# EAGLE board Low-profile_SD_(4-boards)(5x5cm) (EAGLE 6.4)
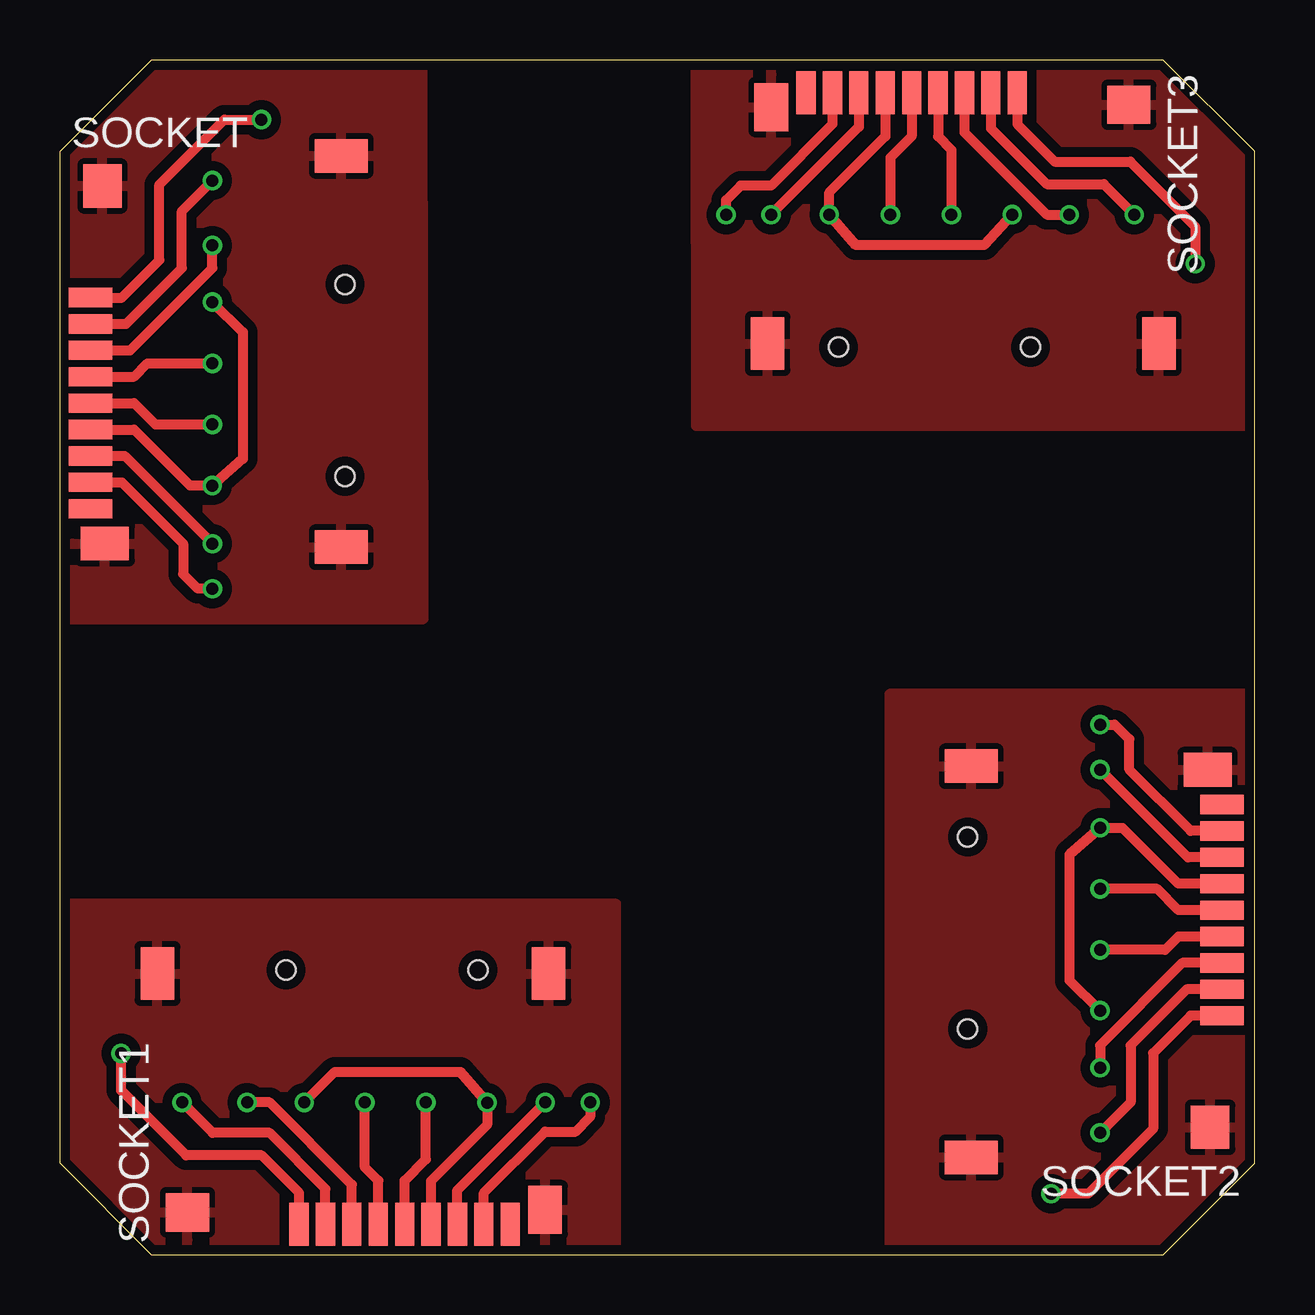
[diagram p0: board, top side]
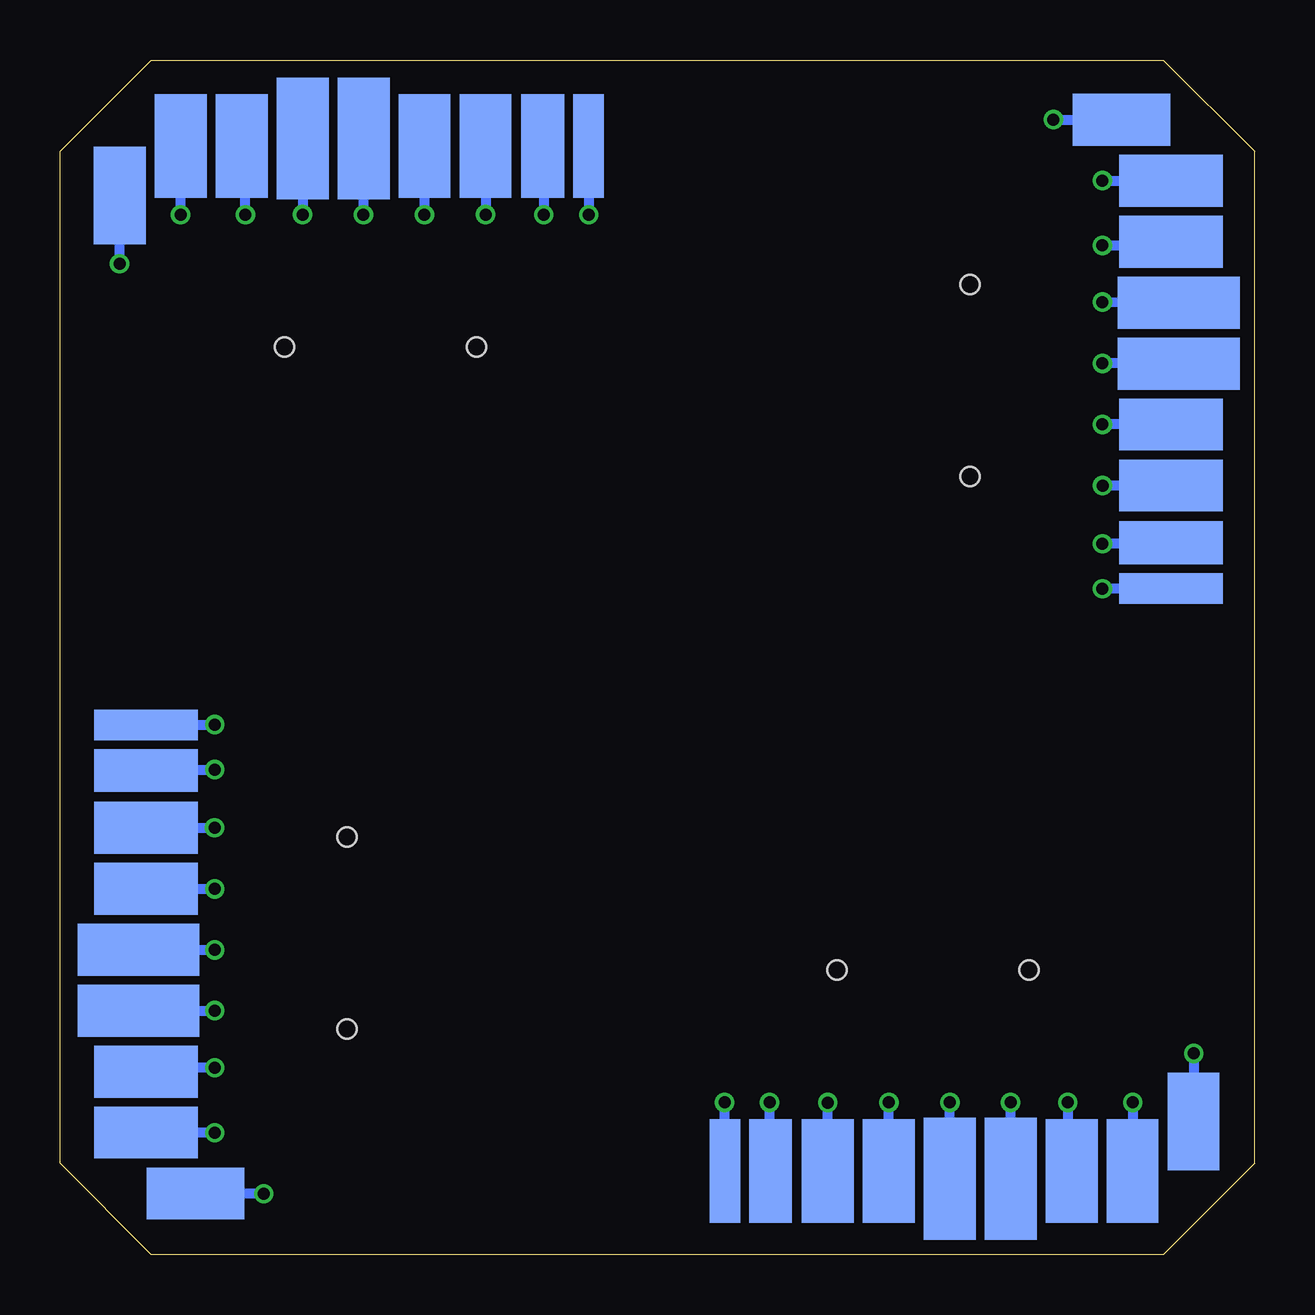
[diagram p1: board, bottom side, seen from below]

Size 49.78 x 49.78 mm. Coordinates in mm from the lower left corner, seen from the top.
Outline: 45.97,49.78 3.81,49.78 0,45.97 0,3.81 3.81,0 45.97,0 49.78,3.81 49.78,45.97 45.97,49.78
Copper layers (1*16): Top 0.035mm / dielectric 1.5mm / Bottom 0.035mm
Design rules "default": minimum track width 6mil, minimum drill 12mil, track to track 6mil, track to pad 6mil, pad to pad 6mil, via to via 6mil, smd to smd 0mil, copper to edge 10mil, drill to drill 10mil, minimum pad ring 10mil, minimum via ring 6mil, stop-mask expansion 2mil, vias tented up to drill 100mil, thermal gap 10mil

## Footprints (pad centres in the part's own frame; a part is rotated, then mirrored left to right if it is on the bottom)
SD_PADS = smd 4.318 x 2.159: CLK -4.128,13.811; CMD -4.128,6.191; DAT3 -4.128,3.651; VSS2 -4.128,16.351 | smd 4.318 x 1.778: DAT0 -4.128,18.733 | smd 4.318 x 1.27: DAT1 -4.128,20.637 | smd 4.064 x 2.159: DAT2 -2.064,1.111 | smd 5.08 x 2.159: VDD -4.445,11.271; VSS1 -4.445,8.731
MICROSD_PP = smd 1.8 x 0.8: 1 0,3.85; 2 0,2.75; 3 0,1.65; 4 0,0.55; 5 0,-0.55; 6 0,-1.65; 7 0,-2.75; 8 0,-3.85; 9 0,-4.95 | smd 1.6 x 1.8: GND@1 0.5,8.5 | smd 2.2 x 1.4: GND@2 10.45,9.75; GND@4 10.45,-6.55 | smd 2 x 1.4: GND@3 0.6,-6.4 | hole 0.8: 10.6,4.4; 10.6,-3.6

## Placement (x,y rotation side)
SD-PCB  SD_CARD_PADS  [SD_PADS]  7.62,48.41 180 bottom
SD-PCB1  SD_CARD_PADS  [SD_PADS]  1.44,7.62 90 bottom
SD-PCB2  SD_CARD_PADS  [SD_PADS]  42.07,1.44 0 bottom
SD-PCB3  SD_CARD_PADS  [SD_PADS]  48.41,42.07 270 bottom
SOCKET  MICROSD  [MICROSD_PP]  1.27,36.04 0 top
SOCKET1  MICROSD  [MICROSD_PP]  13.81,1.27 90 top
SOCKET2  MICROSD  [MICROSD_PP]  48.42,13.81 180 top
SOCKET3  MICROSD  [MICROSD_PP]  36.04,48.42 270 top

## Library data of the parts
SD-PCB SD-PCB1-SD-PCB3 SOCKET SOCKET1-SOCKET3 = ardublog-jra

## Nets
GND: SOCKET.GND@1 SOCKET.GND@2 SOCKET.GND@3 SOCKET.GND@4
GND1: SOCKET1.GND@1 SOCKET1.GND@2 SOCKET1.GND@3 SOCKET1.GND@4
GND2: SOCKET2.GND@1 SOCKET2.GND@2 SOCKET2.GND@3 SOCKET2.GND@4
GND3: SOCKET3.GND@1 SOCKET3.GND@2 SOCKET3.GND@3 SOCKET3.GND@4
N$1: SD-PCB.DAT3 SOCKET.2
N$2: SD-PCB.CMD SOCKET.3
N$3: SD-PCB.VDD SOCKET.4
N$4: SD-PCB.CLK SOCKET.5
N$5: SD-PCB.VSS1 SD-PCB.VSS2 SOCKET.6
N$6: SD-PCB.DAT0 SOCKET.7
N$7: SD-PCB.DAT1 SOCKET.8
N$8: SD-PCB.DAT2 SOCKET.1
N$9: SD-PCB1.DAT3 SOCKET1.2
N$10: SD-PCB1.CMD SOCKET1.3
N$11: SD-PCB1.VDD SOCKET1.4
N$12: SD-PCB1.CLK SOCKET1.5
N$13: SD-PCB1.VSS1 SD-PCB1.VSS2 SOCKET1.6
N$14: SD-PCB1.DAT0 SOCKET1.7
N$15: SD-PCB1.DAT1 SOCKET1.8
N$16: SD-PCB1.DAT2 SOCKET1.1
N$17: SD-PCB2.DAT3 SOCKET2.2
N$18: SD-PCB2.CMD SOCKET2.3
N$19: SD-PCB2.VDD SOCKET2.4
N$20: SD-PCB2.CLK SOCKET2.5
N$21: SD-PCB2.VSS1 SD-PCB2.VSS2 SOCKET2.6
N$22: SD-PCB2.DAT0 SOCKET2.7
N$23: SD-PCB2.DAT1 SOCKET2.8
N$24: SD-PCB2.DAT2 SOCKET2.1
N$25: SD-PCB3.DAT3 SOCKET3.2
N$26: SD-PCB3.CMD SOCKET3.3
N$27: SD-PCB3.VDD SOCKET3.4
N$28: SD-PCB3.CLK SOCKET3.5
N$29: SD-PCB3.VSS1 SD-PCB3.VSS2 SOCKET3.6
N$30: SD-PCB3.DAT0 SOCKET3.7
N$31: SD-PCB3.DAT1 SOCKET3.8
N$32: SD-PCB3.DAT2 SOCKET3.1

## Tracks (layer width: path | path; a pad name or v marks a point on that pad's centre or on a via)
GND
  pour Top (isolate 0.406): 0.04,26.47 15.16,26.49 15.12,49.74 3.81,49.72 0,45.91
GND1
  pour Top (isolate 0.406): 23.18,0 23.18,14.62 0.12,14.62 0.12,3.81 3.93,0
GND2
  pour Top (isolate 0.406): 49.69,23.39 34.56,23.37 34.56,0.1 45.88,0.12 49.69,3.93
GND3
  pour Top (isolate 0.406): 26.47,49.68 26.5,34.54 49.75,34.55 49.72,45.88 45.91,49.69
N$1  (via drill 0.5)
  Top 0.406: SOCKET.2 2.75,38.79 5.08,41.12 5.08,43.49 v6.35,44.76
  Bottom 0.406: SD-PCB.DAT3 3.65,44.93 3.64,44.92 3.8,44.76 v6.35,44.76
N$2  (via drill 0.5)
  Top 0.406: SOCKET.3 2.92,37.69 6.35,41.12 v6.35,42.05
  Bottom 0.406: SD-PCB.CMD 3.65,42.39 3.65,42.28 3.64,42.27 3.86,42.05 v6.35,42.05
N$3  (via drill 0.5)
  Top 0.406: SOCKET.4 3.09,36.59 3.64,37.14 v6.35,37.14
  Bottom 0.406: SD-PCB.VDD 3.33,37.31 3.5,37.14 v6.35,37.14
N$4  (via drill 0.5)
  Top 0.406: SOCKET.5 3.09,35.49 3.98,34.6 v6.35,34.6
  Bottom 0.406: SD-PCB.CLK 3.65,34.77 3.82,34.6 v6.35,34.6
N$5  (via drill 0.5)
  Top 0.406: v6.35,39.7 7.62,38.45 7.62,33.16 v6.34,32.05 5.42,32.05 3.09,34.39 SOCKET.6
  Bottom 0.406: SD-PCB.VSS1 v6.35,39.7 | SD-PCB.VSS2 v6.34,32.05
N$6  (via drill 0.5)
  Top 0.406: v6.35,29.63 6.3,29.68 6.29,29.68 2.69,33.29 SOCKET.7
  Bottom 0.406: SD-PCB.DAT0 3.53,29.63 v6.35,29.63
N$7  (via drill 0.5)
  Top 0.406: SOCKET.8 2.58,32.19 5.13,29.63 5.13,28.36 5.74,27.75 v6.35,27.75
  Bottom 0.406: SD-PCB.DAT1 3.51,27.75 v6.35,27.75
N$8  (via drill 0.5)
  Top 0.406: SOCKET.1 2.58,39.89 4.14,41.45 4.14,44.59 6.85,47.3 v8.39,47.3
  Bottom 0.406: 5.4,47.47 SD-PCB.DAT2 v8.39,47.29 v8.39,47.3
N$9  (via drill 0.5)
  Top 0.406: SOCKET1.2 11.06,2.75 8.73,5.08 6.36,5.08 v5.09,6.35
  Bottom 0.406: SD-PCB1.DAT3 4.92,3.65 4.93,3.64 5.09,3.8 v5.09,6.35
N$10  (via drill 0.5)
  Top 0.406: SOCKET1.3 12.16,2.92 8.73,6.35 v7.79,6.35
  Bottom 0.406: SD-PCB1.CMD 7.46,3.65 7.57,3.65 7.58,3.64 7.79,3.86 v7.79,6.35
N$11  (via drill 0.5)
  Top 0.406: SOCKET1.4 13.26,3.09 12.71,3.64 v12.71,6.35
  Bottom 0.406: SD-PCB1.VDD 12.54,3.33 12.71,3.5 v12.71,6.35
N$12  (via drill 0.5)
  Top 0.406: SOCKET1.5 14.36,3.09 15.25,3.98 v15.25,6.35
  Bottom 0.406: SD-PCB1.CLK 15.08,3.65 15.25,3.82 v15.25,6.35
N$13  (via drill 0.5)
  Top 0.406: v10.17,6.35 11.45,7.62 16.68,7.62 v17.79,6.34 17.79,5.42 15.46,3.09 SOCKET1.6
  Bottom 0.406: SD-PCB1.VSS1 v10.17,6.35 | SD-PCB1.VSS2 v17.79,6.34
N$14  (via drill 0.5)
  Top 0.406: v20.22,6.35 20.16,6.3 20.16,6.29 16.56,2.69 SOCKET1.7
  Bottom 0.406: SD-PCB1.DAT0 20.22,3.53 v20.22,6.35
N$15  (via drill 0.5)
  Top 0.406: SOCKET1.8 17.66,2.58 20.22,5.13 21.49,5.13 22.09,5.74 v22.09,6.35
  Bottom 0.406: SD-PCB1.DAT1 22.09,3.51 v22.09,6.35
N$16  (via drill 0.5)
  Top 0.406: SOCKET1.1 9.96,2.58 8.4,4.14 5.25,4.14 2.55,6.85 v2.55,8.39
  Bottom 0.406: 2.38,5.4 SD-PCB1.DAT2 v2.55,8.39
N$17  (via drill 0.5)
  Top 0.406: SOCKET2.2 46.94,11.06 44.61,8.73 44.61,6.36 v43.34,5.09
  Bottom 0.406: SD-PCB2.DAT3 46.04,4.92 46.05,4.93 45.88,5.09 v43.34,5.09
N$18  (via drill 0.5)
  Top 0.406: SOCKET2.3 46.77,12.16 43.34,8.73 v43.34,7.79
  Bottom 0.406: SD-PCB2.CMD 46.04,7.46 46.04,7.57 46.05,7.58 45.83,7.79 v43.34,7.79
N$19  (via drill 0.5)
  Top 0.406: SOCKET2.4 46.6,13.26 46.04,12.71 v43.34,12.71
  Bottom 0.406: SD-PCB2.VDD 46.35,12.54 46.19,12.71 v43.34,12.71
N$20  (via drill 0.5)
  Top 0.406: SOCKET2.5 46.6,14.36 45.71,15.25 v43.34,15.25
  Bottom 0.406: SD-PCB2.CLK 46.04,15.08 45.87,15.25 v43.34,15.25
N$21  (via drill 0.5)
  Top 0.406: v43.34,10.17 42.07,11.42 42.07,16.68 v43.35,17.79 44.27,17.79 46.6,15.46 SOCKET2.6
  Bottom 0.406: SD-PCB2.VSS1 v43.34,10.17 | SD-PCB2.VSS2 v43.35,17.79
N$22  (via drill 0.5)
  Top 0.406: v43.34,20.22 43.39,20.16 43.4,20.16 47,16.56 SOCKET2.7
  Bottom 0.406: SD-PCB2.DAT0 46.16,20.22 v43.34,20.22
N$23  (via drill 0.5)
  Top 0.406: SOCKET2.8 47.11,17.66 44.55,20.22 44.55,21.49 43.95,22.09 v43.34,22.09
  Bottom 0.406: SD-PCB2.DAT1 46.18,22.09 v43.34,22.09
N$24  (via drill 0.5)
  Top 0.406: SOCKET2.1 47.11,9.96 45.55,8.4 45.55,5.25 42.84,2.55 v41.3,2.55
  Bottom 0.406: 44.29,2.38 SD-PCB2.DAT2 v41.3,2.55
N$25  (via drill 0.5)
  Top 0.406: SOCKET3.2 38.79,46.94 41.12,44.61 43.49,44.61 v44.76,43.34
  Bottom 0.406: SD-PCB3.DAT3 44.93,46.04 44.92,46.05 44.76,45.88 v44.76,43.34
N$26  (via drill 0.5)
  Top 0.406: SOCKET3.3 37.69,46.77 41.12,43.34 v42.05,43.34
  Bottom 0.406: SD-PCB3.CMD 42.39,46.04 42.28,46.04 42.27,46.05 42.05,45.83 v42.05,43.34
N$27  (via drill 0.5)
  Top 0.406: SOCKET3.4 36.59,46.6 37.14,46.04 v37.14,43.34
  Bottom 0.406: SD-PCB3.VDD 37.31,46.35 37.14,46.19 v37.14,43.34
N$28  (via drill 0.5)
  Top 0.406: SOCKET3.5 35.49,46.6 34.6,45.71 v34.6,43.34
  Bottom 0.406: SD-PCB3.CLK 34.77,46.04 34.6,45.87 v34.6,43.34
N$29  (via drill 0.5)
  Top 0.406: v39.67,43.34 38.5,42.07 33.16,42.07 v32.05,43.35 32.05,44.27 34.39,46.6 SOCKET3.6
  Bottom 0.406: SD-PCB3.VSS1 v39.67,43.34 | SD-PCB3.VSS2 v32.05,43.35
N$30  (via drill 0.5)
  Top 0.406: v29.63,43.34 29.68,43.39 29.68,43.4 33.29,47 SOCKET3.7
  Bottom 0.406: SD-PCB3.DAT0 29.63,46.16 v29.63,43.34
N$31  (via drill 0.5)
  Top 0.406: SOCKET3.8 32.19,47.11 29.63,44.55 28.36,44.55 27.75,43.95 v27.75,43.34
  Bottom 0.406: SD-PCB3.DAT1 27.75,46.18 v27.75,43.34
N$32  (via drill 0.5)
  Top 0.406: SOCKET3.1 39.89,47.11 41.45,45.55 44.59,45.55 47.3,42.84 v47.3,41.3
  Bottom 0.406: 47.47,44.29 SD-PCB3.DAT2 v47.29,41.3 v47.3,41.3

## Text on the board
216bmp: 2013.05.18 | Low-Profile Micro-SD to SD | Card Adaptor for Raspberry Pi | Designed in Spain by J.Rodrigo | http://www.jrodrigo.net